# Altium PCB PCB1.PcbDoc
Units mm, origin at the board's own origin, x right, y up, seen from the top; angles counter-clockwise.
Board outline 152.4 x 101.6 mm, 4 copper layers (Top Layer, Int1 (GND), Int2 (PWR), Bottom Layer), stack 1.57 mm thick; 35 components, 26 nets, 170 pads, 29 vias.
Unrouted connection lines stored in the file: 92.
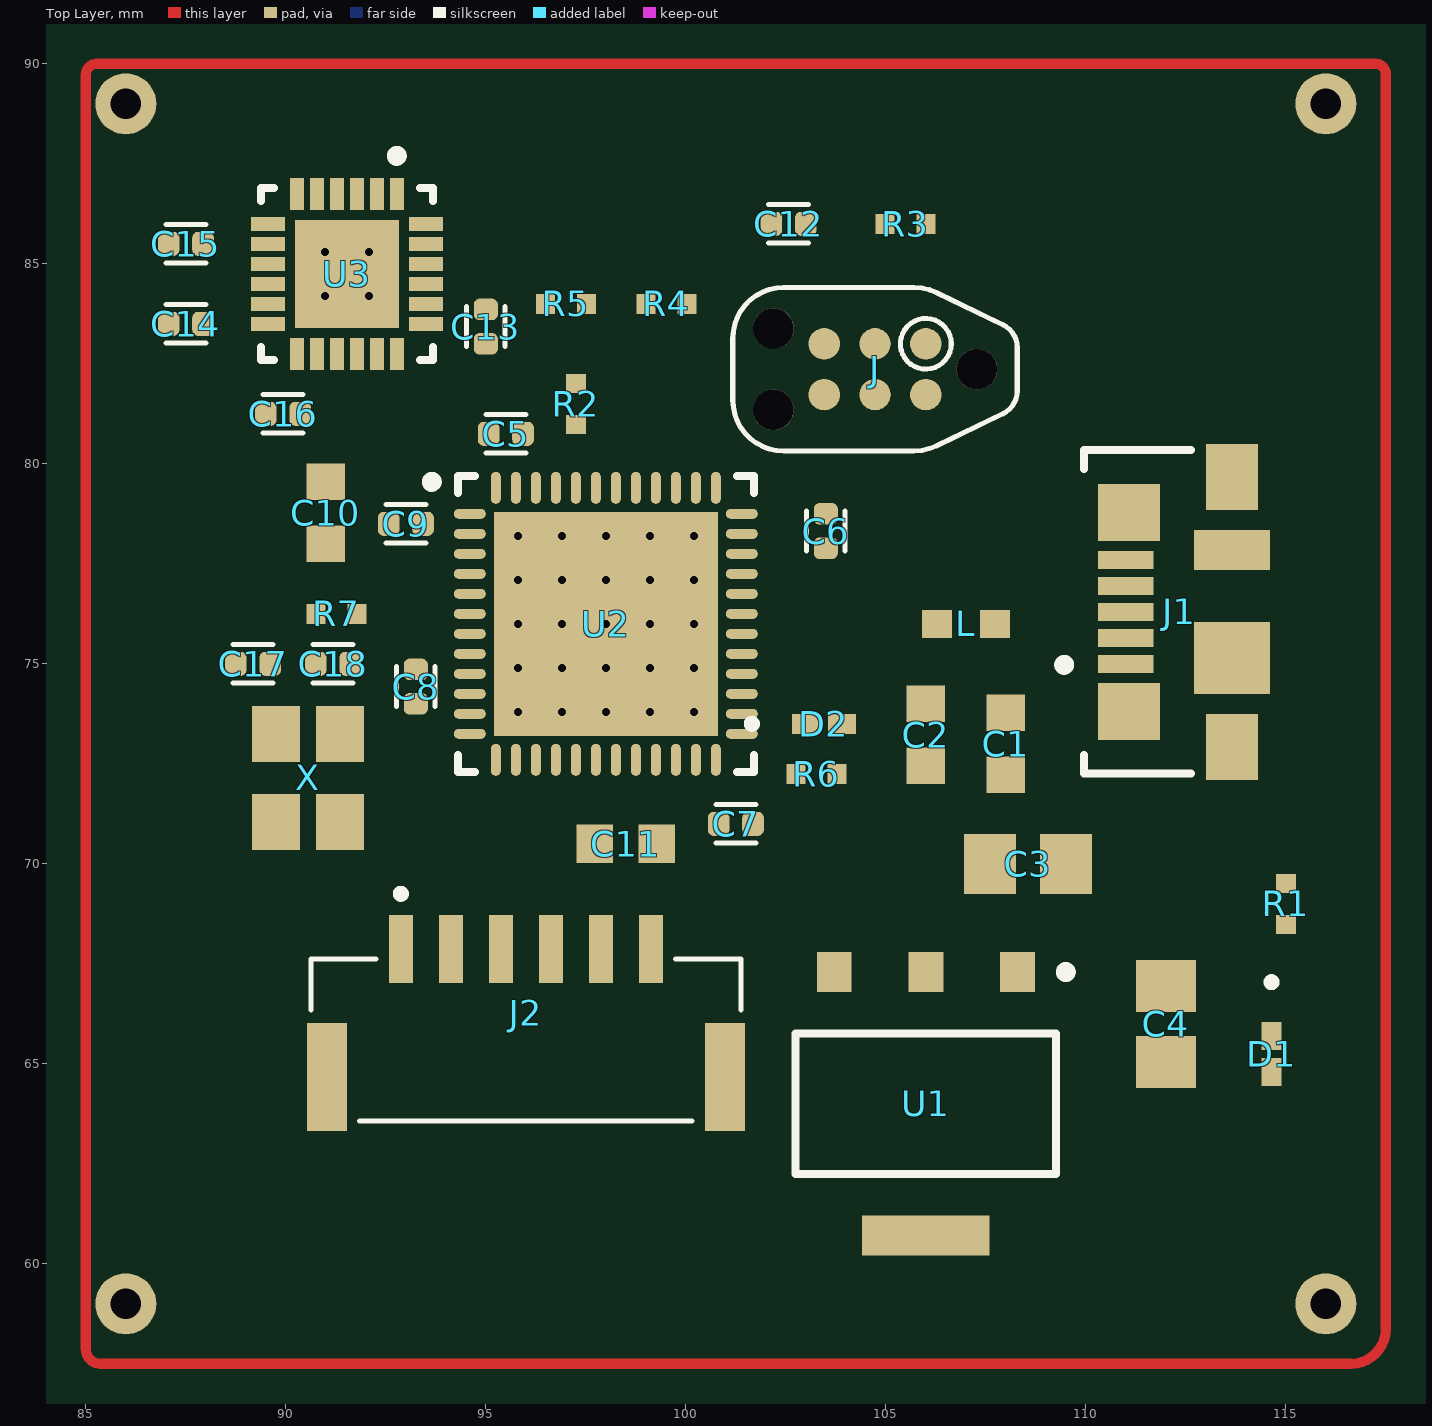
[diagram p0: Top Layer view]
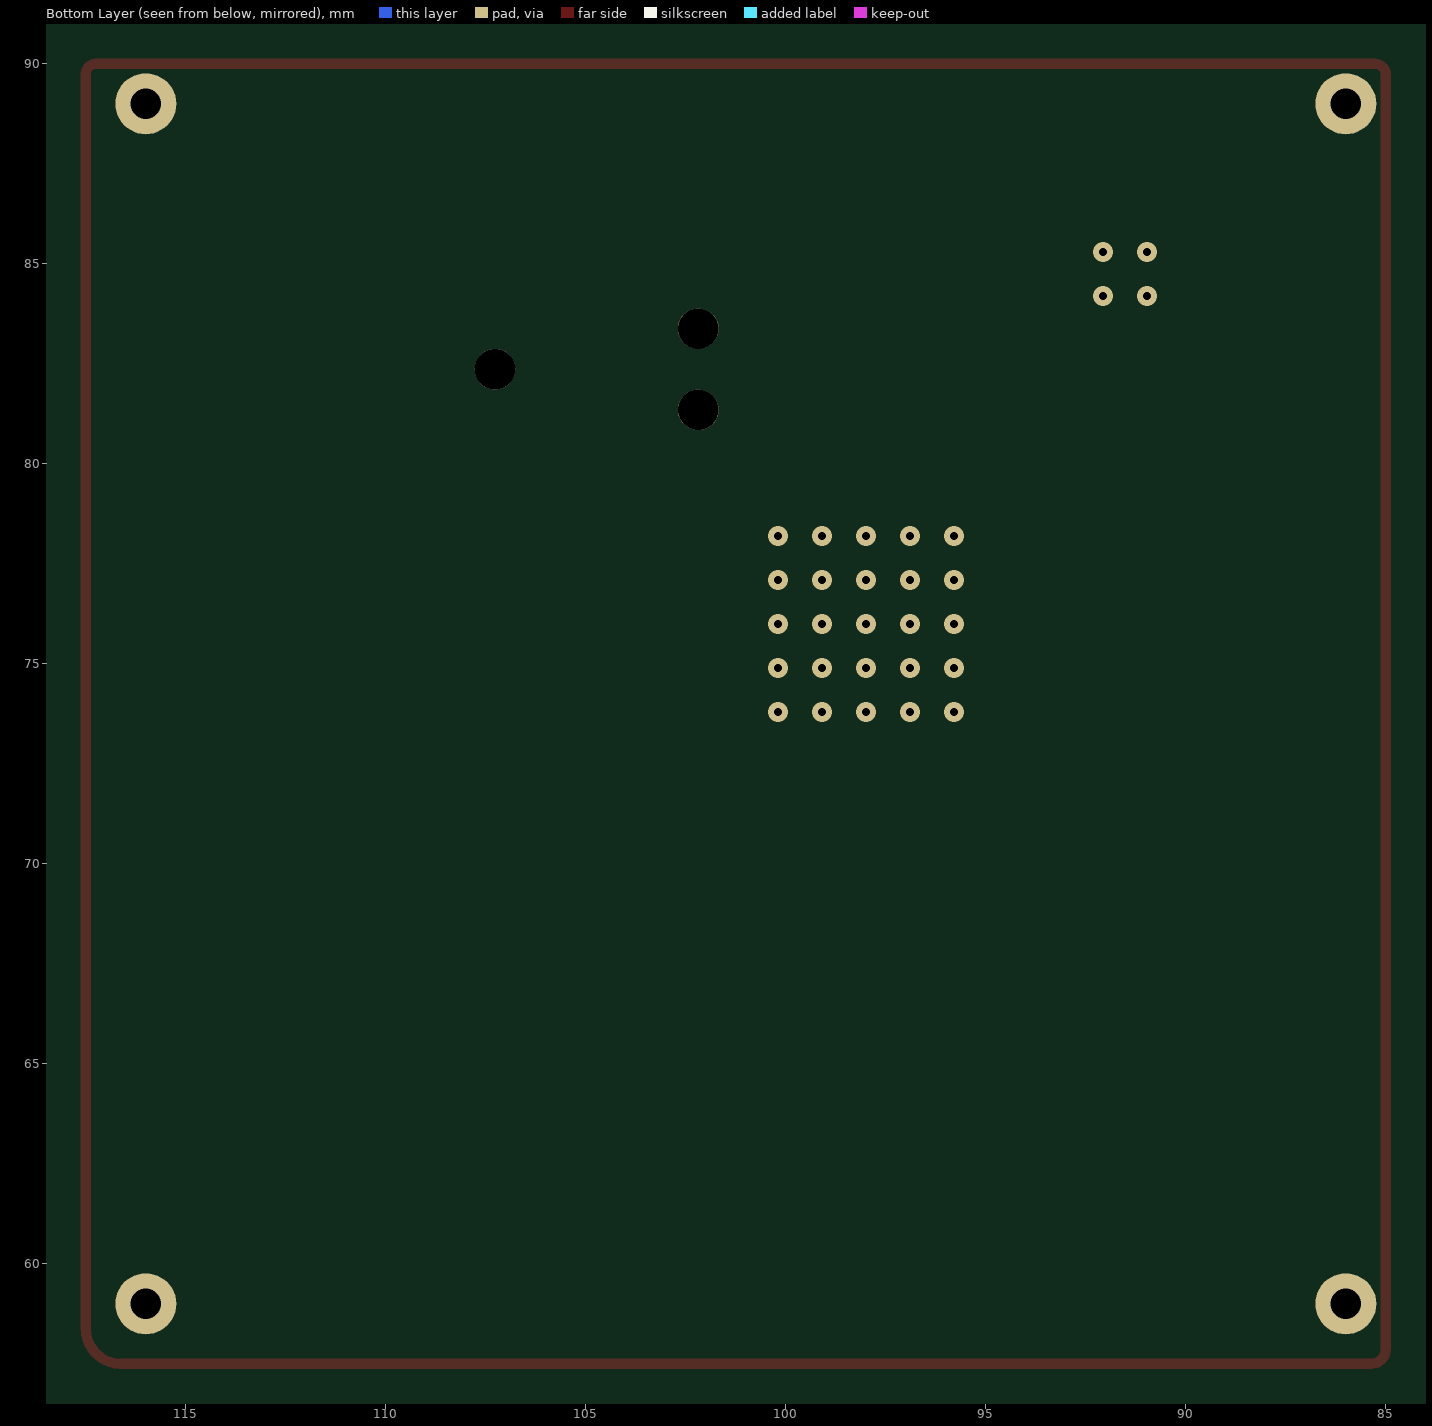
[diagram p1: Bottom Layer view, seen from below]

## Layer stack, top to bottom
Top Solder: solder mask 0.0254, SM-001, Dk 4
Top Layer: signal copper 0.035
Dielectric 1: prepreg 0.2, PP-017, Dk 4.6
Int1 (GND): signal copper 0.0175
Dielectric 3: core 1.065, Core-039, Dk 4.6
Int2 (PWR): signal copper 0.0175
Dielectric 5: prepreg 0.2, PP-017, Dk 4.6
Bottom Layer: signal copper 0.035
Bottom Solder: solder mask 0.0254, SM-001, Dk 4

## Board outline
25.4,25.4 177.8,25.4 177.8,127 25.4,127

## Design rules (kind name [scope] priority, off if disabled: settings)
Clearance [All] p1: gap=0.2 ignorepadtopadclearanceinfootprint=FALSE
DiffPairsRouting [All] p1: maxlimit=0.254 minlimit=0.254 mostfreqgap=0.254 toplayer_minwidth=0.381 toplayer_maxwidth=0.381 toplayer_prefwidth=0.381 midlayer1_minwidth=0.381 midlayer1_maxwidth=0.381 midlayer1_prefwidth=0.381 midlayer2_minwidth=0.381 midlayer2_maxwidth=0.381 midlayer2_prefwidth=0.381 bottomlayer_minwidth=0.381 bottomlayer_maxwidth=0.381 bottomlayer_prefwidth=0.381 maxuncoupledlength=12.7
PolygonConnect [All] p1: connectstyle=Direct reliefconductorwidth=0.254 reliefentries=4 polygonreliefangle="90 Angle" airgapwidth=0.254
RoutingVias [All] p1: holewidth=0.711 width=1.27 viastyle="Through Hole" minholewidth=0.711 minwidth=1.27 maxholewidth=0.711 maxwidth=1.27
SolderMaskExpansion [All] p1: expansion=0 istentingtop=FALSE
SupplyNets "Schematic Supply Nets_4" [InNet('+3V3')] p1: voltage=0.000
SupplyNets "Schematic Supply Nets_3" [InNet('IMU SCL')] p2: voltage=0.000
SupplyNets "Schematic Supply Nets_2" [InNet('VBUS')] p3: voltage=0.000
SupplyNets "Schematic Supply Nets" [InNet('+5V')] p4: voltage=0.000
UnRoutedNet [All] p1: checkbadconnections=TRUE
Width [All] p1: maxlimit=1 minlimit=0.2 preferedwidth=0.3 midlayer1_minwidth=0.254 midlayer1_maxwidth=0.254 midlayer1_prefwidth=0.254 midlayer2_minwidth=0.254 midlayer2_maxwidth=0.254 midlayer2_prefwidth=0.254 minimp=50.000000 maximp=50.000000 favimp=50.000000
28 further rules are at their usual default settings.

## Classes and differential pairs
differential pair class "DIFF USB": USB_D
differential pair USB_D: +USB_D_P -USB_D_N

## Components (designator, comment, footprint, x,y, rotation, side; value= is the part's Value field where it differs from the comment)
C1 "2u2" CAPC1608X90N 108,73 r90 top
C2 "2u2" CAPC1608X90N 106,73.225 r90 top
C3 "22u" CAPC2012X70 108.55,70 r0 top
C4 "22u" CAPC2012X70 112,66 r270 top
C5 "100n" CAPC1005X55N 95.5,80.75 r0 top
C6 "100n" CAPC1005X55N 103.5,78.32 r90 top
C7 "100n" CAPC1005X55N 101.25,71 r0 top
C8 "100n" CAPC1005X55N 93.25,74.43 r90 top
C9 "100n" CAPC1005X55N 93,78.5 r0 top
C10 "2.2u" CAPC1608X90N 91,78.775 r90 top
C11 "2u2" CAPC1608X90N 98.5,70.5 r0 top
C12 "100n" CAPC1005X55N 102.57,86 r180 top
C13 "2n2" CAPC1005X55N 95,83.43 r90 top
C14 "10n" CAPC1005X55N 87.5,83.5 r180 top
C15 "100n" CAPC1005X55N 87.5,85.5 r180 top
C16 "100n" CAPC1005X55N 89.93,81.25 r0 top
C17 "10p" CAPC1005X55N 89.18,75 r180 top
C18 "10p" CAPC1005X55N 91.18,75 r180 top
D1 "GREEN" LED_APHHS1005LCGCK 114.644,65.241 r270 top
D2 "Red" LED_APHHS1005LSECK/J3-PF 103.45,73.5 r0 top
J "TC2030-CTX" TC2030-IDC-NL 104.73,82.365 r180 top
J1 "473460001" FP-473460001-MFG 113.31,76.3 r90 top
J2 "SM06B-GHS-TB" JST_SM06B-GHS-TB 96,66 r0 top
L "120R" WE-CBF_0603_W2.2 107,76 r180 top
R1 "1k" RES_ERJU02F5101X 115,69 r270 top
R2 "10k" RES_ERJU02F5101X 97.25,81.5 r90 top
R3 "10k" RES_ERJU02F5101X 105.488,86 r0 top
R4 "2k2" RES_ERJU02F5101X 99.512,84 r0 top
R5 "2k2" RES_ERJU02F5101X 97,84 r180 top
R6 "1k" RES_ERJU02F5101X 103.262,72.25 r0 top
R7 "0R" RES_ERJU02F5101X 91.262,76.25 r0 top
U1 "ams1117" FP-ams1117-IPC_C 106,64 r270 top
U2 "STM32F411CEU6" STM-UFQFPN48_L 98,76 r0 top
U3 "MPU-6050" IS-QFN-24_V 91.525,84.75 r270 top
X "FA-238" OSCCC320X250X70-4N 90.55,72.15 r90 top

## Footprints (in the part's own frame and the unit in brackets; to place one, negate y for a bottom-side part, rotate by r counter-clockwise, add the part's x,y. Pads: shape width x height; smd on the part's side, far side on the other; paste and mask are expansions set on the pad)
CAPC1005X55N [mm]
  rrect53% 0.54x0.6 smd: 1(-0.43,0) 2(0.43,0)
  silkscreen extent -0.5,-0.48 0.5,0.48, body extent -0.5,-0.25 0.5,0.25, height 0.55
CAPC1608X90N [mm]
  rect 0.92x0.97 smd: 1(-0.775,0) 2(0.775,0)
CAPC2012X70 [mm]
  rect 1.3x1.5 smd: 1(-0.95,0) 2(0.95,0)
  body extent -1,-0.63 1,0.63, height 0.3
FP-473460001-MFG [mm]
  rect 0.45x1.38 smd paste+0 mask+0: 1(-1.3,2.31) 2(-0.65,2.31) 3(0,2.31) 4(0.65,2.31) 5(1.3,2.31)
  rect 1.425x1.55 smd paste+0 mask+0: 6(-2.488,2.225) 7(2.488,2.225)
  rect 1.65x1.3 smd paste+0 mask+0: 8(-3.375,-0.35) 11(3.375,-0.35)
  rect 1.8x1.9 smd paste+0 mask+0: 9(-1.15,-0.35)
  rect 1x1.9 smd paste+0 mask+0: 10(1.55,-0.35)
  silkscreen extent -4.05,0.67 4.05,3.97, body extent -4.3,-2.48 4.3,3.45, height 0.25
FP-ams1117-IPC_C [mm]
  rect 1.004x0.872 smd paste+0 mask+0: 1(-3.295,2.29) 2(-3.295,0) 3(-3.295,-2.29)
  rect 1.004x3.182 smd paste+0 mask+0: 4(3.295,0)
  silkscreen extent -3.42,-3.25 1.75,3.63, body extent -3.9,-3.35 3.9,3.35, height 0.25
IS-QFN-24_V [mm] "QFN, 24-Leads, Body 4x4mm, Pitch 0.5mm, Thermal Pad 2.7x2.6mm"
  rect 0.8x0.35 smd: 1(-2,1.25) 2(-2,0.75) 3(-2,0.25) 4(-2,-0.25) 5(-2,-0.75) 6(-2,-1.25) 13(2,-1.25) 14(2,-0.75) 15(2,-0.25) 16(2,0.25) 17(2,0.75) 18(2,1.25)
  rect 0.35x0.85 smd mask+0.102: 7(-1.25,-1.975) 8(-0.75,-1.975) 9(-0.25,-1.975) 10(0.25,-1.975) 11(0.75,-1.975) 12(1.25,-1.975) 19(1.25,1.975) 20(0.75,1.975) 21(0.25,1.975) 22(-0.25,1.975) 23(-0.75,1.975) 24(-1.25,1.975)
  rect 2.7x2.6 smd: 25(0,0)
  silkscreen extent -3.07,-2.15 2.15,2.15, body extent -2,-2 2,2, height 0.95
JST_SM06B-GHS-TB [mm]
  rect 0.6x1.7 smd paste+0 mask+0.102: 1(-3.125,1.875) 2(-1.875,1.875) 3(-0.625,1.875) 4(0.625,1.875) 5(1.875,1.875) 6(3.125,1.875)
  rect 1x2.7 smd paste+0 mask+0.102: MP1(-4.975,-1.325) MP2(4.975,-1.325)
  silkscreen extent -5.38,-2.42 5.38,3.35, body extent -5.38,-2.05 5.38,2.8, height 4.25
LED_APHHS1005LCGCK [mm]
  rect 0.7x0.5 smd mask+0.05: 1(-0.45,0) 2(0.45,0)
  silkscreen extent -1.9,-0.1 -1.7,0.1, body extent -0.5,-0.25 0.5,0.25, height 0.5
LED_APHHS1005LSECK/J3-PF [mm]
  rect 0.7x0.5 smd mask+0.05: 1(-0.45,0) 2(0.45,0)
  silkscreen extent -1.9,-0.1 -1.7,0.1, body extent -0.5,-0.25 0.5,0.25, height 0.5
OSCCC320X250X70-4N [mm]
  rect 1.4x1.2 smd: 1(-1.1,-0.8) 2(1.1,-0.8) 3(1.1,0.8) 4(-1.1,0.8)
RES_ERJU02F5101X [mm]
  rect 0.475x0.5 smd: 1(-0.512,0) 2(0.512,0)
STM-UFQFPN48_L [mm] "QFN, 48-Leads, Body 7.1x7.1mm, Pitch 0.5mm, Thermal Pad 5.6x5.6mm, IPC High Density"
  oval 0.8x0.25 smd: 1(-3.4,2.75) 2(-3.4,2.25) 3(-3.4,1.75) 4(-3.4,1.25) 5(-3.4,0.75) 6(-3.4,0.25) 7(-3.4,-0.25) 8(-3.4,-0.75) 9(-3.4,-1.25) 10(-3.4,-1.75) 11(-3.4,-2.25) 12(-3.4,-2.75) 25(3.4,-2.75) 26(3.4,-2.25) 27(3.4,-1.75) 28(3.4,-1.25) 29(3.4,-0.75) 30(3.4,-0.25) 31(3.4,0.25) 32(3.4,0.75) 33(3.4,1.25) 34(3.4,1.75) 35(3.4,2.25) 36(3.4,2.75)
  oval 0.25x0.8 smd: 13(-2.75,-3.4) 14(-2.25,-3.4) 15(-1.75,-3.4) 16(-1.25,-3.4) 17(-0.75,-3.4) 18(-0.25,-3.4) 19(0.25,-3.4) 20(0.75,-3.4) 21(1.25,-3.4) 22(1.75,-3.4) 23(2.25,-3.4) 24(2.75,-3.4) 37(2.75,3.4) 38(2.25,3.4) 39(1.75,3.4) 40(1.25,3.4) 41(0.75,3.4) 42(0.25,3.4) 43(-0.25,3.4) 44(-0.75,3.4) 45(-1.25,3.4) 46(-1.75,3.4) 47(-2.25,3.4) 48(-2.75,3.4)
  rect 5.6x5.6 smd: 49(0,0)
  silkscreen extent -4.47,-3.7 3.7,3.7, body extent -3.55,-3.55 3.55,3.55, height 0.6
TC2030-IDC-NL [mil]
  round 31 smd paste-39.37: 1(-50,-25) 2(-50,25) 3(0,-25) 4(0,25) 5(50,-25) 6(50,25)
  round 40 hole 40 unplated: ""(-100,0) ""(100,-40) ""(100,40)
  silkscreen extent -140,-80 140,81
WE-CBF_0603_W2.2 [mm]
  rect 0.75x0.7 smd paste+0 mask+0.102: 1(-0.725,0) 2(0.725,0)

## Part data
C1 C2 C10 C11: library part C0603C225K4PACTU, "2.2ÂµF Â±10% 16V Ceramic Capacitor X5R 0603 _1608 Metric_", Package="0603 KEMET", Availability=Unavailable, MF=KEMET, MP=C0603C225K4PACTU, Price=None, SnapEDA_Link=https://www.snapeda.com/parts/C0603C225K4PACTU/KEMET/view-part/609526/?ref=snap
C3 C4: library part CC0805KFX7R7BB105, "1ÂµF Â±10% 16V Ceramic Capacitor X7R 0805 (2012 Metric)", Package="0805 Yageo", Availability=Warning, Check_prices=https://www.snapeda.com/parts/CC0805KFX7R7BB105/Yageo/view-part/1818153/?ref=eda, MF=Yageo, MP=CC0805KFX7R7BB105, Price=None, Purchase-URL=https://pricing.snapeda.com/search/part/CC0805KFX7R7BB105/?ref=eda, SnapEDA_Link=https://www.snapeda.com/parts/CC0805KFX7R7BB105/Yageo/view-part/1818153/?ref=snap
C5 C6 C7 C8 C9 C12 C13 C14 C15 C16 C17 C18: library part CC0402JRX7R7BB104, "0.1 ÂµF Â±5% 16V Ceramic Capacitor X7R 0402 (1005 Metric)", Package="0402 Yageo", Check_prices=https://www.snapeda.com/parts/CC0402JRX7R7BB104/Yageo/view-part/?ref=eda, MF=Yageo, MP=CC0402JRX7R7BB104, SnapEDA_Link=https://www.snapeda.com/parts/CC0402JRX7R7BB104/Yageo/view-part/?ref=snap
D1: library part APHHS1005LCGCK, "Green 570nm LED Indication - Discrete 1.9V 0402 (1005 Metric)", Package="0402 Kingbright Corporation", Check_prices=https://www.snapeda.com/parts/APHHS1005LCGCK/Kingbright/view-part/?ref=eda, MF=Kingbright, MP=APHHS1005LCGCK, SnapEDA_Link=https://www.snapeda.com/parts/APHHS1005LCGCK/Kingbright/view-part/?ref=snap
D2: library part APHHS1005LSECK/J3-PF, "Red 625nm LED Indication - Discrete 1.8V 0402 (1005 Metric)", Package="0402 Kingbright Corporation", Check_prices=https://www.snapeda.com/parts/APHHS1005LSECK/J3-PF/Kingbright/view-part/?ref=eda, MF=Kingbright, MP=APHHS1005LSECK/J3-PF, SnapEDA_Link=https://www.snapeda.com/parts/APHHS1005LSECK/J3-PF/Kingbright/view-part/?ref=snap
J: "CortexÂ® Plug-Of-Nailsâ„¢ Adapter Cable", Package=None, Availability=Unavailable, MF="Tag-Connect LLC", MP=TC2030-CTX, Price=None, SnapEDA_Link=https://www.snapeda.com/parts/TC2030-CTX/Tag-Connect%20LLC/view-part/225831/?ref=snap
J1: library part CMP-2000-05246-2, "CONN RCPT USB2.0 MICRO B SMD R/A", Current Rating=1.8A, Manufacturer=Molex, Package=0, Temperature="-30°C to +85°C", Temperature Range High=+85°C, Temperature Range Low=-30°C, Voltage Rating=30V, Automotive=No, Category=Conn, ComponentLink2Description=Datasheet, ComponentLink2URL=https://www.molex.com/webdocs/datasheets/pdf/en-us/0473460001_IO_CONNECTORS.pdf, Conn Orientation="Right Angle", Contact Material=Gold,Nickel, Device Class L1=Connectors, Device Class L2="USB Connectors", Device Class L3=unset, Digikey Description="CONN RCPT USB2.0 MICRO B SMD R/A", Footprint Url=https://www.molex.com/pdm_docs/sd/473460001_sd.pdf, Height=2.945mm, Is Female=yes, Lead Free=Yes, Manufacturer Part Number=473460001, Number Of Contacts=5, Octopart=https://octopart.com/47346-0001-molex-7164928, Pitch=0.65mm, RoHS=TRUE, Shielding=true, Usb Standard="USB 2.0"
J2: "Connector Header Surface Mount, Right Angle 6 position 0.049 (1.25mm)", Package=None, Check_prices=https://www.snapeda.com/parts/SM06B-GHS-TB/JST/view-part/?ref=eda, MF="JST Sales", MP=SM06B-GHS-TB, SnapEDA_Link=https://www.snapeda.com/parts/SM06B-GHS-TB/JST/view-part/?ref=snap
L: library part WE-CBF_0603, "FERRITE BEAD 600 OHM 0603 1LN", Package="0603 Wurth Elektronik", Check_prices=https://www.snapeda.com/parts/74279265/W%25C3%25BCrth+Elektronik+Midcom/view-part/?ref=eda, MF="WÃ¼rth Elektronik", MP=74279265, SnapEDA_Link=https://www.snapeda.com/parts/74279265/W%25C3%25BCrth+Elektronik+Midcom/view-part/?ref=snap
R1 R2 R3 R4 R5 R6 R7: library part ERJU02F5101X, Package=None, Availability=Unavailable, MP=ERJU02F5101X, Price=None
U1: library part CMP-209535-000002-1, "1A LOW DROPOUT VOLTAGE REGULATOR", RoHS Compliant=Yes
U2: library part CMP-0243-00165-1, "ARM Cortex-M4 32-bit MCU+FPU, 512 KB Flash, 128 KB RAM, 36 I/Os, 48-Pin UFQFPN, -40 to 85 degC, Tray", I/Os (High Current)=36, Operating Frequency(F) (Processor speed) (MHz)=100, Package Description=UFQFPN48, Package Reference="48-Pin Ultra Thin Fine Pitch Quad Flat No-Lead, 7 x 7 x 0.6 mm Body, 0.5 mm Pitch, Exposed Pad", Supply Voltage(Vcc) min (V)=1.7, ComponentLink1Description="Manufacturer URL", ComponentLink1URL=http://www.st.com/, ComponentLink2Description=Datasheet, ComponentLink2URL=http://www.st.com/st-web-ui/static/active/en/resource/technical/document/datasheet/DM00115249.pdf, Core="ARM Cortex-M4", DatasheetVersion="Rev. 6", FLASH Size (Prog) (kB)=512, Internal RAM Size (kB)=128, Mounting Technology="Surface Mount", Packing=Tray
U3: library part CMP-1753-00002-2, "3-Axis Gyroscope, Accelerometer and a Digital Motion Processor(TM) (DMP), 2.375 to 3.46 V, -40 to 85 degC, 24-Pin QFN, RoHS, Tape and Reel", Manufacturer=InvenSense, Standard Package=5,000, Category=Sensors,Transducers, Datasheet URL=http://datasheet.octopart.com/MPU-6050-InvenSense-datasheet-14421344.pdf, Datasheet Version="Rev. 3.3, 05/2012", Dynamic Catalog=MPU-6000™Series, Family=Multifunction, Featured Product=MPU-60506-Axis,IntegratedI²CSolution, Manufacturer URL=http://www.invensense.com/, Online Catalog=MPU-6000™Series, Other Names="1428-1007-2 / MPU6050", Output Type=Digital, Sensor Type=MotionTracking, Unit PriceUSD=Digital
X: "19.968MHz Â±20ppm Crystal 7pF 80 Ohms 4-SMD, No Lead", Package="SMD-4 EPSON", Availability=Unavailable, MF=EPSON, MP=FA-238, Price=None, SnapEDA_Link=https://www.snapeda.com/parts/FA-238/EPSON/view-part/562897/?ref=snap

## Free pads (board coordinates)
  round 1.524 hole 0.762: MH(86,59) MH(86,89) MH(116,59) MH(116,89)

## Via types
v1: diameter 0.5, hole 0.2, Top Layer to Bottom Layer, 29 vias

## Nets (pads, with @x,y where several pads share a name; then routed paths per layer and width w, separated by ;. In a path a pad name is that pad's centre, name@x,y a point inside that pad or via, vN(x,y) a via of type N, cw(c..) or ccw(c..) an arc to the next point about the centre after c; other vN are vias at no path point)
+3V3: C4.1 C14.1 C16.1 D1.2 J2.1 J.1 R3.2 R4.2 U1.2 U1.4 U3.8 U3.13
+5V: C2.2 C3.1 L.2 U1.3
"IMU CPOUT": C13.1 U3.20
"IMU INT": U2.45 U3.12
"IMU REGOUT": C15.1 U3.10
"IMU SCL": C1.1 C2.1 C3.2 C4.2 C5.2 C6.2 C7.2 C8.2 C9.2 C10.1 C11.1 C12.2 C13.2 C14.2 C15.2 C16.2 C17.2 C18.2 J1.5 J2.6 J.5 R1.1 R2.2 R4.1 R5.1 R6.2 U1.1 U2.8 U2.23 U2.35 U2.42 U2.43 U2.47 U2.49 U3.1 U3.9 U3.11 U3.23 U3.24 U3.25 X.1 X.2
  other v1: 90.975,84.2 92.075,84.2 90.975,85.3 92.075,85.3
LED_PWR_K: D1.1 R1.2
"MCU BOOT0": R2.1 U2.44
"MCU NRST": C12.1 J.3 R3.1 U2.7
"MCU OSC OUT": R7.1 U2.6
MCU_LED_A: D2.2 U2.26
MCU_LED_K: D2.1 R6.1
"MCU_OSC IN": C17.1 U2.5 X.4
MCU_PA4: J2.2 U2.14
MCU_PA5: J2.3 U2.15
MCU_PA6: J2.4 U2.16
MCU_PA7: J2.5 U2.17
MCU_SWCLK: J.4 U2.37
MCU_SWDIO: J.2 U2.34
MCU_SWO: J.6 U2.39
MCU_VCAP1: C11.2 U2.22
NetC5_1: C5.1 C6.1 C7.1 C8.1 C9.1 C10.2 U2.1 U2.9 U2.24 U2.36 U2.48
USB_D_N: J1.2 U2.32
USB_D_P: J1.3 U2.33
VBUS: C1.2 J1.1 L.1
XTAL_IN: C18.1 R7.2 X.3
pads on no net: J1.4 J1.6 J1.7 J1.8 J1.9 J1.10 J1.11 J2.MP1 J2.MP2 J. R5.2 U2.2 U2.3 U2.4 U2.10 U2.11 U2.12 U2.13 U2.18 U2.19 U2.20 U2.21 U2.25 U2.27 U2.28 U2.29 U2.30 U2.31 U2.38 U2.40 U2.41 U2.46 U3.2 U3.3 U3.4 U3.5 U3.6 U3.7 U3.14 U3.15 U3.16 U3.17 U3.18 U3.19 U3.21 U3.22
copper on no net: | length 129.2
  Top Layer w0.254: 85,57.872 ccw(c85.372,57.872) 85.372,57.5 116.628,57.5 ccw(c116.628,58.372) 117.5,58.372 117.5,89.746 ccw(c117.246,89.746) 117.246,90 85.27,90 ccw(c85.27,89.73) 85,89.73 85,86.187 85,57.872
  other v1: 95.8,73.8 96.9,73.8 98,73.8 99.1,73.8 100.2,73.8 95.8,74.9 96.9,74.9 98,74.9 99.1,74.9 100.2,74.9 95.8,76 96.9,76 98,76 99.1,76 100.2,76 95.8,77.1 96.9,77.1 98,77.1 99.1,77.1 100.2,77.1 95.8,78.2 96.9,78.2 98,78.2 99.1,78.2 100.2,78.2

## Other copper
Top Layer: